# EAGLE board pmod_clock_906.7f20437c (EAGLE 6.5.4)
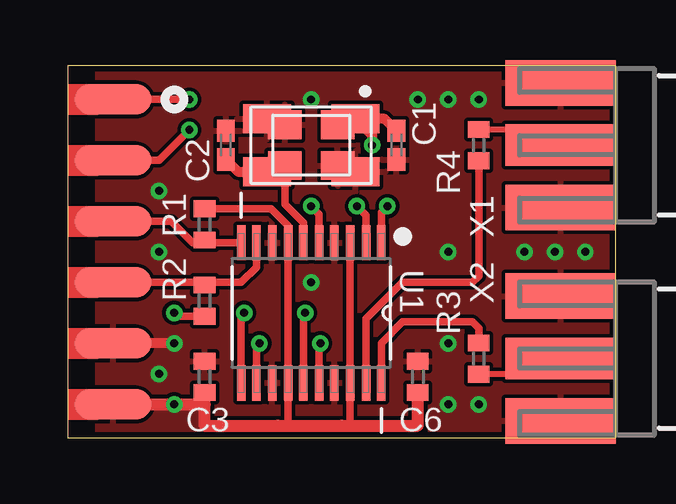
[diagram p0: board, top side]
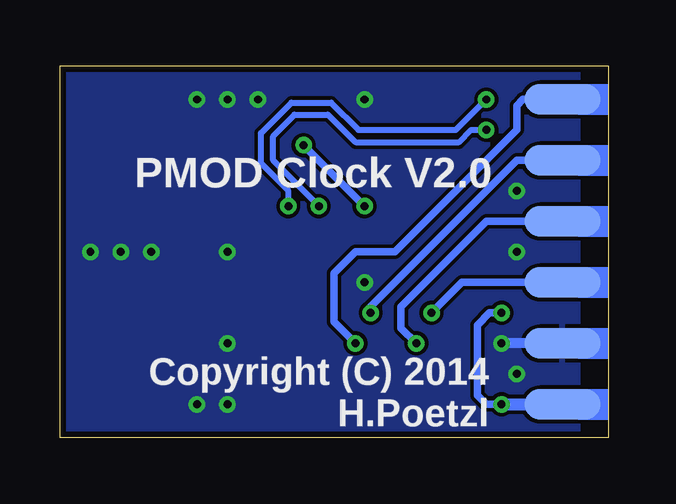
[diagram p1: board, bottom side, seen from below]

Size 22.86 x 15.49 mm. Coordinates in mm from the lower left corner, seen from the top.
Outline: 0,0 22.86,0 22.86,15.49 0,15.49 0,0
Copper layers (1*16): Top 0.0356mm / dielectric 1.5011mm / Bottom 0.0356mm
Design rules "LaenPCBOrder *": minimum track width 6mil, minimum drill 13mil, track to track 6mil, track to pad 6mil, pad to pad 6mil, via to via 6mil, smd to smd 6mil, copper to edge 10mil, drill to drill 6mil, minimum pad ring 7mil, minimum via ring 7mil, stop-mask expansion 4mil, vias tented up to drill 15mil, thermal gap 6mil

## Footprints (pad centres in the part's own frame; a part is rotated, then mirrored left to right if it is on the bottom)
C0402K = smd 0.925 x 0.74: 1 -0.6,0; 2 0.6,0
C0402 = smd 0.7 x 0.9: 1 -0.65,0; 2 0.65,0
SMD1.27-3.175HR = smd 1.27 x 3.175: 1 0,0
MIX = smd 2 x 1.2: 1 -1.85,-1.1; 2 1.85,-1.1; 3 1.85,1.1; 4 -1.85,1.1 | smd 1.4 x 1.2: 1@ -1.1,-0.85; 2@ 1.1,-0.85; 3@ 1.1,0.85; 4@ -1.1,0.85
R0402 = smd 0.7 x 0.9: 1 -0.65,0; 2 0.65,0
SOP65P640X120-20N = smd 1.473 x 0.356: 1 -2.921,2.921; 2 -2.921,2.286; 3 -2.921,1.626; 4 -2.921,0.965; 5 -2.921,0.33; 6 -2.921,-0.33; 7 -2.921,-0.965; 8 -2.921,-1.626; 9 -2.921,-2.286; 10 -2.921,-2.921; 11 2.921,-2.921; 12 2.921,-2.286; 13 2.921,-1.626; 14 2.921,-0.965; 15 2.921,-0.33; 16 2.921,0.33; 17 2.921,0.965; 18 2.921,1.626; 19 2.921,2.286; 20 2.921,2.921
SMA-EDGE = smd 4.6 x 1.73: 1 -2.3,0 | smd 4.6 x 1.9: 2@3 -2.3,-2.6; 2@4 -2.3,2.6

## Placement (x,y rotation side)
C1  10p  [C0402K]  13.72,12.19 270 top
C2  10p  [C0402K]  6.6,12.19 90 top
C3  1µ  [C0402]  5.71,2.54 90 top
C6  100n  [C0402]  14.61,2.54 90 top
PAD1  [SMD1.27-3.175HR]  1.91,14.1 270 top
PAD2  [SMD1.27-3.175HR]  1.91,11.56 270 top
PAD3  [SMD1.27-3.175HR]  1.91,9.02 270 top
PAD4  [SMD1.27-3.175HR]  1.91,6.48 270 top
PAD5  [SMD1.27-3.175HR]  1.91,3.94 270 top
PAD6  [SMD1.27-3.175HR]  1.91,1.4 270 top
PAD7  [SMD1.27-3.175HR]  1.91,14.1 90 bottom
PAD8  [SMD1.27-3.175HR]  1.91,11.56 90 bottom
PAD9  [SMD1.27-3.175HR]  1.91,9.02 90 bottom
PAD10  [SMD1.27-3.175HR]  1.91,6.48 90 bottom
PAD11  [SMD1.27-3.175HR]  1.91,3.94 90 bottom
PAD12  [SMD1.27-3.175HR]  1.91,1.4 90 bottom
Q1  SMD-4P-2G5.0X3.2+3.2X2.5  [MIX]  10.16,12.19 180 top
R1  4k7  [R0402]  5.71,8.89 90 top
R2  4k7  [R0402]  5.71,5.71 270 top
R3  22R  [R0402]  17.14,3.3 90 top
R4  22R  [R0402]  17.14,12.19 270 top
U1  CDCE906PW  [SOP65P640X120-20N]  10.16,5.21 270 top
X1  BU-SMA-E  [SMA-EDGE]  22.86,12.19 0 top
X2  BU-SMA-E  [SMA-EDGE]  22.86,3.3 0 top

## Library data of the parts
C1-C3 C6 R1-R4 = rcl
PAD1-PAD12 = wirepad
Q1 = xtal
U1 = cdce906; MPN: CDCE906PW; OC_FARNELL: 1791641; OC_NEWARK: 06M7226; PACKAGE: TSSOP-20; SUPPLIER: Texas Instruments
X1 X2 = sma

## Nets
+3V3: C3.1 C6.1 PAD6.1 PAD12.1 R1.2 R2.2 U1.3 U1.7 U1.14 U1.18
GND: C1.2 C2.2 C3.2 C6.2 PAD5.1 PAD11.1 Q1.2 Q1.2@ Q1.4 Q1.4@ U1.4 U1.8 U1.13 U1.17 X1.2@3 X1.2@4 X2.2@3 X2.2@4
N$1: C1.1 Q1.1 Q1.1@ U1.5
N$4: C2.1 Q1.3 Q1.3@ U1.6
N$5: R4.1 X1.1
N$6: R3.1 X2.1
N$12: R3.2 U1.20
S0: PAD1.1 U1.1
S1: PAD2.1 U1.2
SCL: PAD3.1 R1.1 U1.10
SDA: PAD4.1 R2.1 U1.9
Y0: PAD10.1 U1.11
Y1: PAD9.1 U1.12
Y2: PAD8.1 U1.15
Y3: PAD7.1 U1.16
Y5: R4.2 U1.19

## Tracks (layer width: path | path; a pad name or v marks a point on that pad's centre or on a via)
+3V3  (via drill 0.33)
  Top 0.305: U1.3 U1.18 11.79,0.51 11.43,0.51 | 8.76,0.51 9.2,0.51 U1.14 U1.7 9.2,8.84 8.49,9.54 R1.2 | 5.57,5.19 R2.2 4.59,5.06 v4.45,5.21
  Top 0.508: PAD12.1 v4.45,1.4 5.71,1.4 | C6.1 14.61,0.51 11.43,0.51 8.76,0.51 5.71,0.51 5.71,1.4 | 5.71,1.4 C3.1
  Bottom 0.305: v4.45,5.21 4.95,5.21 5.46,4.7 5.46,1.78 5.08,1.4 v4.45,1.4
  Bottom 0.508: v4.45,1.4 PAD12.1
  pour Top: 1.27,0.13 1.27,1.4 5.71,1.4 5.71,0.13
GND  (via drill 0.33)
  Top 0.406: v4.45,3.94 PAD11.1
  Bottom 0.406: PAD11.1 v4.45,3.94
  other vias: 3.81,7.75 15.88,1.4 21.59,7.75 20.32,7.75 19.05,7.75 14.61,14.1 10.16,14.1 15.88,14.1 15.88,7.75 10.16,6.48 17.14,1.4 17.14,14.1 3.81,2.67 15.88,3.94 3.81,10.29
  pour Top: 1.27,15.37 22.86,15.37 22.86,0.13 5.71,0.13 5.71,1.4 1.27,1.4
  pour Bottom: 1.27,15.37 22.86,15.37 22.86,0.13 1.27,0.13
N$1  (via drill 0.33)
  Top 0.305: U1.5 10.49,9.32 v10.16,9.65
  Top 0.406: C1.1 13.22,13.29 Q1.1 | Q1.1 12.7,12.6 v12.7,12.19 | Q1.1@ 11.51,13.29 Q1.1
  Bottom 0.305: v10.16,9.65 v12.7,12.19
N$4
  Top 0.305: U1.6 9.83,8.97 9.06,9.74 Q1.3@
  Top 0.406: C2.1 7.1,11.09 Q1.3 8.81,11.09 Q1.3@
N$5
  Top 0.254: X1.1 19.91,12.84 R4.1
N$6
  Top 0.254: X2.1 19.91,2.65 R3.1
N$12
  Top 0.305: U1.20 13.08,3.94 13.97,4.83 16.89,4.83 17.14,4.57 R3.2
S0  (via drill 0.33)
  Top 0.305: U1.1 13.08,9.4 v13.34,9.65 | v5.08,14.1 PAD1.1
  Bottom 0.254: v13.34,9.65 13.34,10.29 14.48,11.43 14.48,12.7 13.21,13.97 11.56,13.97 10.41,12.83 6.35,12.83 v5.08,14.1
S1  (via drill 0.33)
  Top 0.305: U1.2 12.45,9.27 v12.06,9.65 | v5.08,12.83 3.81,11.56 PAD2.1
  Bottom 0.254: v12.06,9.65 13.97,11.56 13.97,12.57 13.08,13.46 11.68,13.46 10.54,12.32 6.22,12.32 5.71,12.83 v5.08,12.83
SCL
  Top 0.305: U1.10 5.83,8.13 | PAD3.1 4.32,9.02 5.21,8.13 5.83,8.13 | 5.83,8.13 R1.1
SDA
  Top 0.305: U1.9 7.87,7.11 7.24,6.48 5.83,6.48 R2.1 5.6,6.48 PAD4.1
Y0  (via drill 0.33)
  Top 0.305: U1.11 7.24,5.08 v7.37,5.21
  Bottom 0.305: PAD10.1 6.1,6.48 v7.37,5.21
Y1  (via drill 0.33)
  Top 0.305: U1.12 7.87,3.81 v8,3.94
  Bottom 0.305: PAD9.1 5.08,9.02 8.64,5.46 8.64,4.57 v8,3.94
Y2  (via drill 0.33)
  Top 0.305: U1.15 9.83,5.13 v9.91,5.21
  Bottom 0.305: PAD8.1 3.81,11.56 9.91,5.46 v9.91,5.21
Y3  (via drill 0.33)
  Top 0.305: U1.16 10.49,3.89 v10.54,3.94
  Bottom 0.305: v10.54,3.94 11.43,4.83 11.43,6.86 10.54,7.75 8.89,7.75 3.81,12.83 3.81,13.84 3.56,14.1 PAD7.1
Y5
  Top 0.254: 17.13,11.56 R4.2
  Top 0.305: R4.2 17.14,6.73 16.89,6.48 13.97,6.48 12.45,4.95 U1.19

## Text on the board
bPlace: PMOD Clock V2.0 | Copyright (C) 2014 / H.Poetzl